# Altium PCB PCB_Control.V03.R00.PcbDoc (part 2 of 7)
Units mm, origin at the board's own origin, x right, y up, seen from the top; angles counter-clockwise.
Board outline 188 x 90 mm, 6 copper layers (Top Layer, GND 1, PWR, Signal L4, GND 2, Bottom Layer), stack 1.548 mm thick; 541 components, 265 nets, 1491 pads, 2159 vias.
Unrouted connection lines stored in the file: 819.
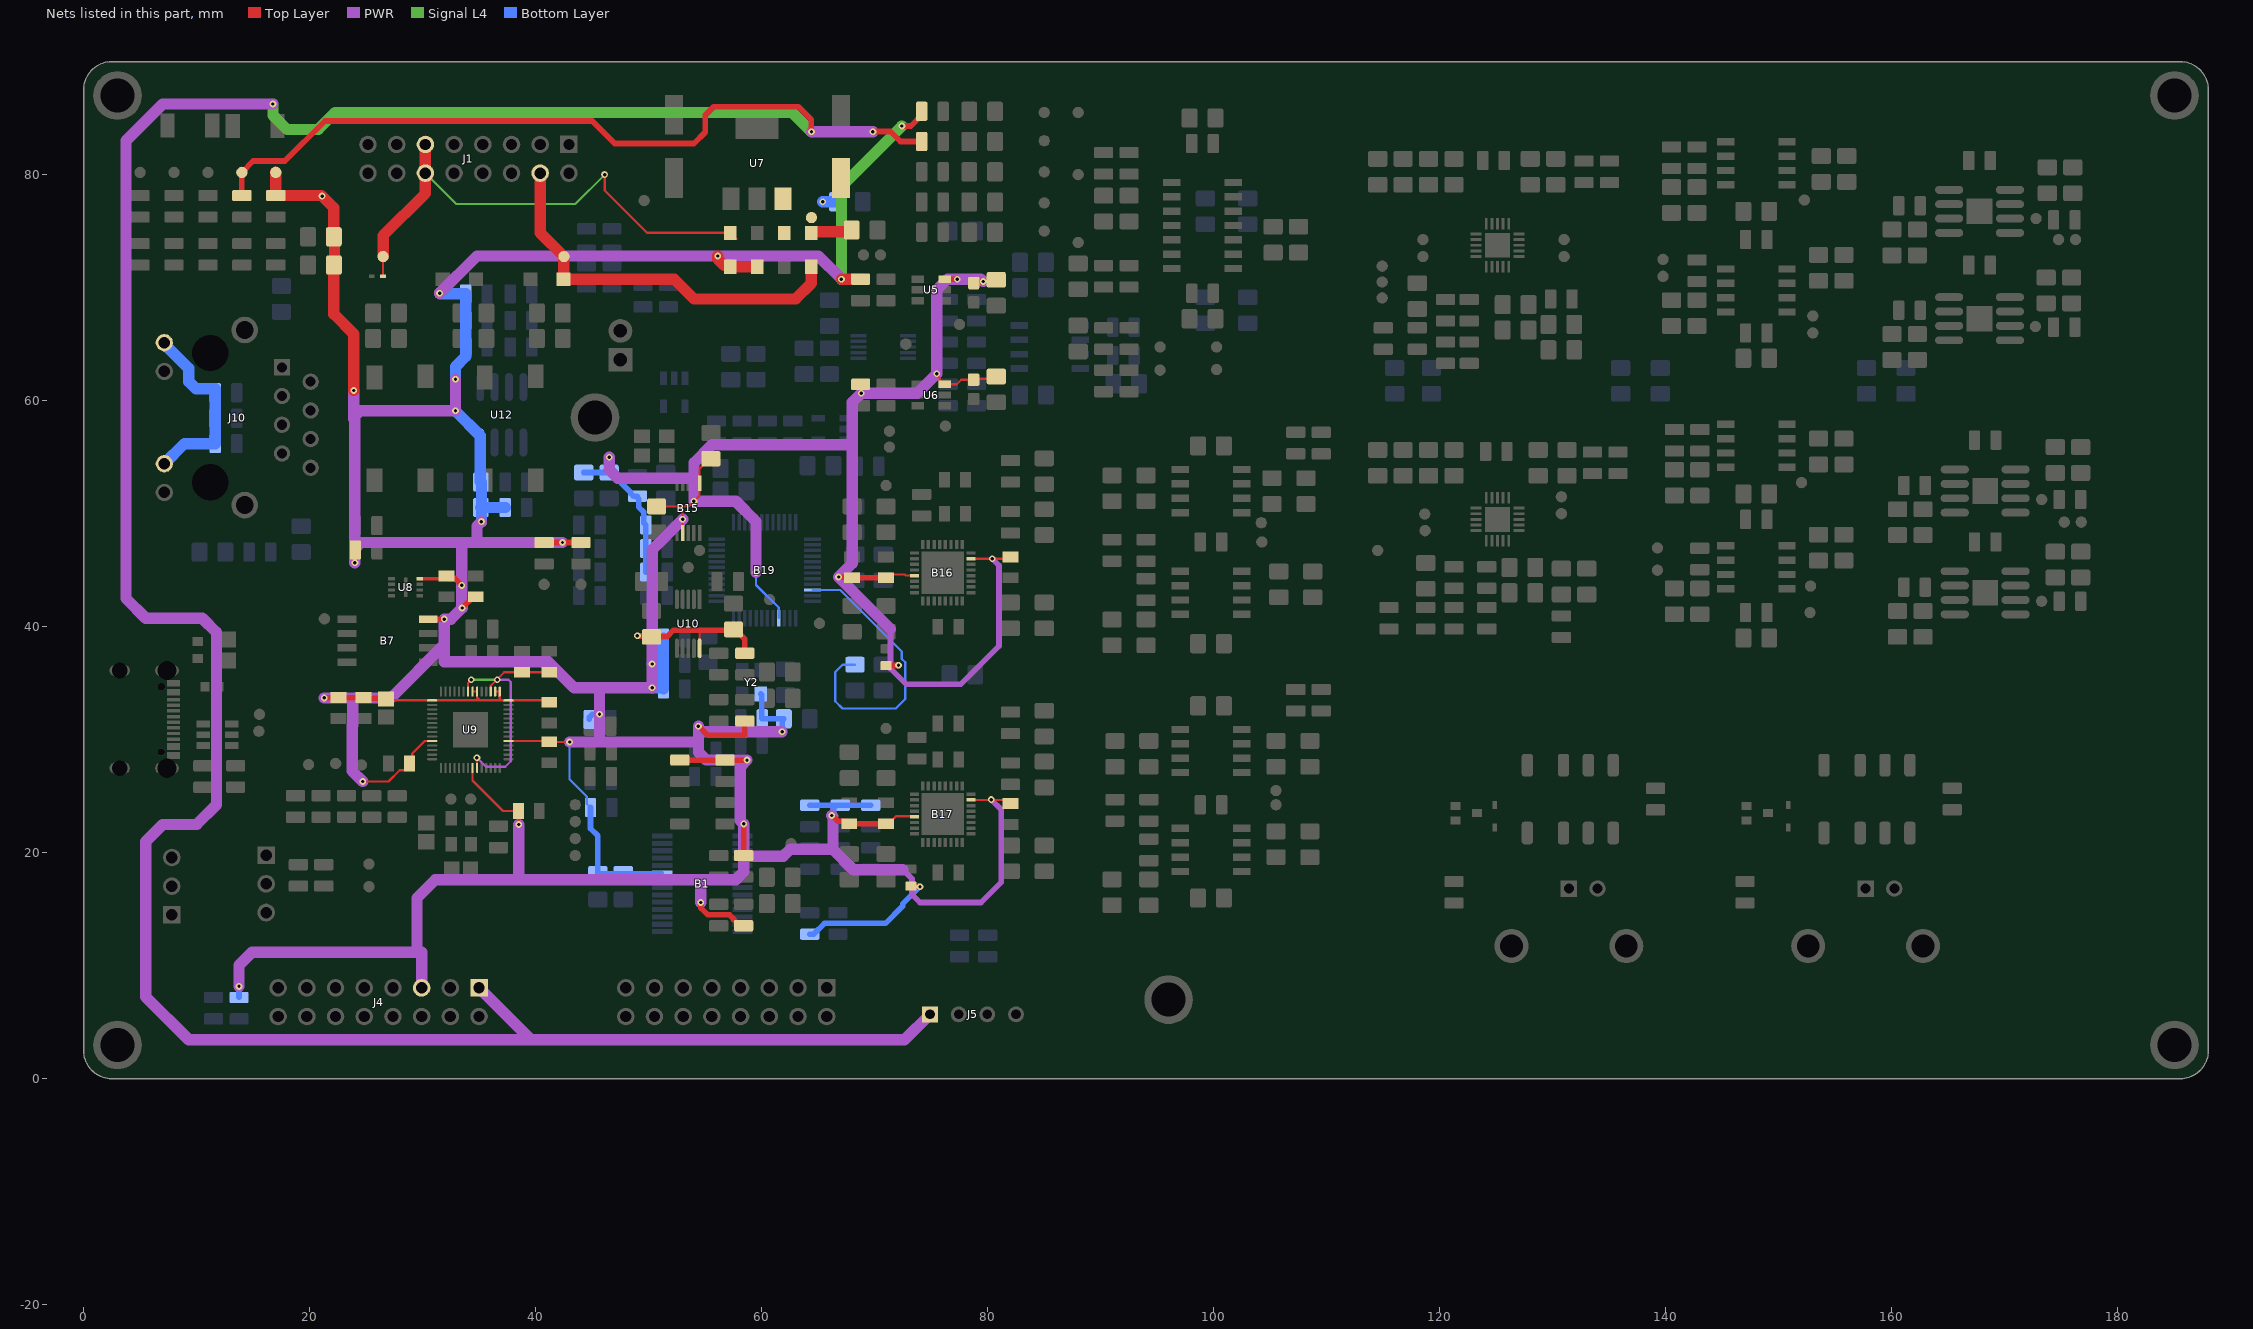
[diagram p6: the nets of this part, all layers, seen from the top]

## Components (designator, comment, footprint, x,y, rotation, side; value= is the part's Value field where it differs from the comment) (continued)
R138 "0R" RES_0805 38.7,67.1 r180 bottom (schematic designator R106)
R139 "0R" RES_0805 38.7,69.45 r180 bottom (schematic designator R107)
R140 "10K" RES_0805 52.25,39 r0 bottom (schematic designator R108)
R141 "10K" RES_0805 50.7,42.75 r0 bottom (schematic designator R109)
R142 "10K" RES_0805 44.75,42.75 r0 bottom (schematic designator R110)
R143 "10K" RES_0805 44.75,44.833 r0 bottom (schematic designator R111)
R144 "10K" RES_0805 44.75,46.917 r0 bottom (schematic designator R112)
R145 "10K" RES_0805 44.75,49 r0 bottom (schematic designator R113)
R146 "10K" RES_0805 50.7,44.833 r0 bottom (schematic designator R114)
R147 "10K" RES_0805 50.7,46.917 r180 bottom (schematic designator R115)
R148 "10K" RES_0805 50.7,49 r180 bottom (schematic designator R116)
R149 "49.9R" RES_0805 12.6,60.7 r180 bottom (schematic designator R117)
R150 "49.9R" RES_0805 12.6,56.2 r180 bottom (schematic designator R118)
R151 "49.9R" RES_0805 12.6,58.45 r180 bottom (schematic designator R119)
R152 "330R" RES_0805 46.75,74.25 r270 bottom (schematic designator R120)
R153 "330R" RES_0805 44.5,74.25 r270 bottom (schematic designator R121)
R154 "10K" RES_0805 52.25,34.5 r0 bottom (schematic designator R122)
R155 "10K" RES_0805 52.25,36.75 r0 bottom (schematic designator R123)
R156 "33R" RES_0805 56,57.25 r270 bottom (schematic designator R124)
R157 "33R" RES_0805 58.25,57.25 r270 bottom (schematic designator R125)
R158 "49.9R" RES_0805 51.75,69.25 r270 bottom (schematic designator R126)
R159 "49.9R 1%" RES_0805 49.5,69.25 r270 bottom (schematic designator R127)
R160 "33R" RES_0805 60.5,57.25 r270 bottom (schematic designator R128)
R161 "33R" RES_0805 62.75,57.25 r270 bottom (schematic designator R129)
R162 "1M" RES_0805 15.6,46.6 r0 bottom (schematic designator R130)
R163 "22 R" RES_0805 46.75,71 r270 bottom (schematic designator R131)
R164 "12K4 1%" RES_0805 69.4,54.2 r180 bottom (schematic designator R132)
R165 "22 R" RES_0805 44.5,71 r270 bottom (schematic designator R133)
R166 "0 R" RES_0805 59.1,29.6 r180 bottom (schematic designator R134)
R167 "0 R" RES_0805 59.1,31.85 r180 bottom (schematic designator R135)
R168 "22R" RES_0805 18.75,24.1 r90 top (schematic designator R136)
R169 "22R" RES_0805 21,24.1 r90 top (schematic designator R137)
R170 "22R" RES_0805 23.25,24.1 r90 top (schematic designator R138)
R171 "22R" RES_0805 25.5,24.1 r90 top (schematic designator R139)
R172 "22R" RES_0805 27.75,24.1 r90 top (schematic designator R140)
R173 "22R" RES_0805 19,18 r90 top (schematic designator R141)
R174 "22R" RES_0805 21.25,18 r90 top (schematic designator R142)
R175 "22R" RES_0805 45.75,26.75 r180 top (schematic designator R143)
R176 "22R" RES_0805 45.75,29 r180 top (schematic designator R144)
R177 "10K" RES_0603 71,37.3 r270 top (schematic designator R145)
R178 "10K" RES_0603 73.2,17.8 r270 top (schematic designator R145)
RLY1 "IM03GR" TECO-IM-8G-WING 127.739,21.75 r270 top
RLY2 "IM03GR" TECO-IM-8G-WING 153.989,21.75 r270 top
SW1 "BOOT" FP-2-1977223-2-MFG 28,57.5 r180 top
SW2 "RESET" FP-2-1977223-2-MFG 37.75,57.5 r180 top
TP1 "TP_NOBOM" PAD_RND_1MM 85,83 r90 top (schematic designator TP51)
TP2 "TP_NOBOM" PAD_RND_1MM 85,85.5 r90 top (schematic designator TP52)
TP3 "TP_NOBOM" PAD_RND_1MM 42.5,72.75 r90 top (schematic designator TP53)
TP4 "TP_NOBOM" PAD_RND_1MM 26.5,72.75 r90 top (schematic designator TP54)
TP5 "TP_NOBOM" PAD_RND_1MM 85,80.25 r90 top (schematic designator TP55)
TP6 "TP_NOBOM" PAD_RND_1MM 85,75 r90 top (schematic designator TP56)
TP7 "TP_NOBOM" PAD_RND_1MM 17,80.2 r0 top (schematic designator TP57)
TP8 "TP_NOBOM" PAD_RND_1MM 14,80.2 r0 top (schematic designator TP58)
TP9 "TP_NOBOM" PAD_RND_1MM 11,80.2 r0 top (schematic designator TP59)
TP10 "TP_NOBOM" PAD_RND_1MM 8,80.2 r0 top (schematic designator TP60)
TP11 "TP_NOBOM" PAD_RND_1MM 5,80.2 r0 top (schematic designator TP61)
TP12 "TP_NOBOM" PAD_RND_1MM 85,77.5 r90 top (schematic designator TP62)
TP13 "TP_NOBOM" PAD_RND_1MM 88,85.5 r90 top (schematic designator TP63)
TP14 "TP_NOBOM" PAD_RND_1MM 172.75,76.115 r90 top (schematic designator TP47)
TP15 "TP_NOBOM" PAD_RND_1MM 176.25,74.25 r90 top (schematic designator TP48)
TP16 "TP_NOBOM" PAD_RND_1MM 174.75,74.25 r90 top (schematic designator TP49)
TP17 "TP_NOBOM" PAD_RND_1MM 172.693,66.557 r90 top (schematic designator TP50)
TP18 "TP_NOBOM" PAD_RND_1MM 173.25,51.25 r90 top (schematic designator TP47)
TP19 "TP_NOBOM" PAD_RND_1MM 176.75,49.25 r90 top (schematic designator TP48)
TP20 "TP_NOBOM" PAD_RND_1MM 175.25,49.25 r90 top (schematic designator TP49)
TP21 "TP_NOBOM" PAD_RND_1MM 173.25,42.25 r90 top (schematic designator TP50)
TP22 "TP_NOBOM" PAD_RND_1MM 71,52.5 r90 top (schematic designator TP32)
TP23 "TP_NOBOM" PAD_RND_1MM 71,31 r90 top (schematic designator TP32)
TP24 "TP_NOBOM" PAD_RND_1MM 54.5,46.75 r90 top (schematic designator TP1)
TP25 "TP_NOBOM" PAD_RND_1MM 53.5,45.25 r90 top (schematic designator TP2)
TP26 "TP_NOBOM" PAD_RND_1MM 100.25,64.75 r90 top (schematic designator TP3)
TP27 "TP_NOBOM" PAD_RND_1MM 100.25,62.75 r90 top (schematic designator TP4)
TP28 "TP_NOBOM" PAD_RND_1MM 114.9,69.1 r90 top (schematic designator TP5)
TP29 "TP_NOBOM" PAD_RND_1MM 114.9,71.9 r90 top (schematic designator TP6)
TP30 "TP_NOBOM" PAD_RND_1MM 114.9,70.5 r90 top (schematic designator TP7)
TP31 "TP_NOBOM" PAD_RND_1MM 114.5,46.75 r90 top (schematic designator TP8)
TP32 "TP_NOBOM" PAD_RND_1MM 44,43.75 r90 top (schematic designator TP9)
TP33 "TP_NOBOM" PAD_RND_1MM 40.75,43.75 r90 top (schematic designator TP10)
TP34 "TP_NOBOM" PAD_RND_1MM 25.25,17 r90 top (schematic designator TP11)
TP35 "TP_NOBOM" PAD_RND_1MM 19.9,27.8 r90 top (schematic designator TP12)
TP36 "TP_NOBOM" PAD_RND_1MM 22.3,27.9 r90 top (schematic designator TP13)
TP37 "TP_NOBOM" PAD_RND_1MM 24.575,27.775 r90 top (schematic designator TP14)
TP38 "TP_NOBOM" PAD_RND_1MM 25.25,19 r90 top (schematic designator TP15)
TP39 "TP_NOBOM" PAD_RND_1MM 65.1,40.3 r90 top (schematic designator TP16)
TP40 "TP_NOBOM" PAD_RND_1MM 62.6,20.8 r90 top (schematic designator TP17)
TP41 "TP_NOBOM" PAD_RND_1MM 43.5,24.25 r90 top (schematic designator TP18)
TP42 "TP_NOBOM" PAD_RND_1MM 43.5,19.75 r90 top (schematic designator TP19)
TP43 "TP_NOBOM" PAD_RND_1MM 43.5,21.25 r90 top (schematic designator TP20)
TP44 "TP_NOBOM" PAD_RND_1MM 72.75,65 r90 top (schematic designator TP21)
TP45 "TP_NOBOM" PAD_RND_1MM 43.5,22.75 r90 top (schematic designator TP22)
TP46 "TP_NOBOM" PAD_RND_1MM 104.25,47.5 r90 top (schematic designator TP30)
TP47 "TP_NOBOM" PAD_RND_1MM 104.2,49.2 r90 top (schematic designator TP31)
TP48 "TP_NOBOM" PAD_RND_1MM 105.5,24.25 r90 top (schematic designator TP30)
TP49 "TP_NOBOM" PAD_RND_1MM 105.5,25.5 r90 top (schematic designator TP31)
TP50 "TP_NOBOM" PAD_RND_1MM 77.5,66.75 r90 top (schematic designator TP37)
TP51 "TP_NOBOM" PAD_RND_1MM 76.25,57.75 r90 top (schematic designator TP37)
TP52 "TP_NOBOM" PAD_RND_1MM 64.4,76.2 r270 top (schematic designator TP23)
TP53 "TP_NOBOM" PAD_RND_1MM 49.6,77.7 r90 top (schematic designator TP24)
TP54 "TP_NOBOM" PAD_RND_1MM 15.55,32.25 r90 top (schematic designator TP25)
TP55 "TP_NOBOM" PAD_RND_1MM 15.5,30.75 r90 top (schematic designator TP26)
TP56 "TP_NOBOM" PAD_RND_1MM 21.3,40.7 r90 top (schematic designator TP27)
TP57 "TP_NOBOM" PAD_RND_1MM 32.5,24.75 r90 top (schematic designator TP28)
TP58 "TP_NOBOM" PAD_RND_1MM 34.25,24.75 r90 top (schematic designator TP29)
TP59 "TP_NOBOM" PAD_RND_1MM 139.75,71 r90 top (schematic designator TP42)
TP60 "TP_NOBOM" PAD_RND_1MM 139.75,72.5 r90 top (schematic designator TP43)
TP61 "TP_NOBOM" PAD_RND_1MM 152.25,77.75 r90 top (schematic designator TP44)
TP62 "TP_NOBOM" PAD_RND_1MM 153,67.5 r90 top (schematic designator TP45)
TP63 "TP_NOBOM" PAD_RND_1MM 153,66 r90 top (schematic designator TP46)
TP64 "TP_NOBOM" PAD_RND_1MM 139.25,45 r90 top (schematic designator TP42)
TP65 "TP_NOBOM" PAD_RND_1MM 139.25,46.975 r90 top (schematic designator TP43)
TP66 "TP_NOBOM" PAD_RND_1MM 152,52.75 r90 top (schematic designator TP44)
TP67 "TP_NOBOM" PAD_RND_1MM 152.8,43.6 r90 top (schematic designator TP45)
TP68 "TP_NOBOM" PAD_RND_1MM 152.75,41.25 r90 top (schematic designator TP46)
TP69 "TP_NOBOM" PAD_RND_1MM 88,80 r90 top (schematic designator TP38)
TP70 "TP_NOBOM" PAD_RND_1MM 88,74 r90 top (schematic designator TP39)
TP71 "TP_NOBOM" PAD_RND_1MM 95.25,62.7 r90 top (schematic designator TP40)
TP72 "TP_NOBOM" PAD_RND_1MM 95.25,64.75 r90 top (schematic designator TP41)
TP73 "TP_NOBOM" PAD_RND_1MM 131,72.75 r90 top (schematic designator TP33)
TP74 "TP_NOBOM" PAD_RND_1MM 118.5,74.25 r90 top (schematic designator TP34)
TP75 "TP_NOBOM" PAD_RND_1MM 131,74.25 r90 top (schematic designator TP35)
TP76 "TP_NOBOM" PAD_RND_1MM 118.5,72.75 r90 top (schematic designator TP36)
TP77 "TP_NOBOM" PAD_RND_1MM 130.75,51.5 r90 top (schematic designator TP33)
TP78 "TP_NOBOM" PAD_RND_1MM 118.663,49.962 r90 top (schematic designator TP34)
TP79 "TP_NOBOM" PAD_RND_1MM 130.75,50 r90 top (schematic designator TP35)
TP80 "TP_NOBOM" PAD_RND_1MM 118.7,48.5 r90 top (schematic designator TP36)
TP81 "TP_NOBOM" PAD_RND_1MM 70.5,72.9 r90 top (schematic designator TP64)
TP82 "TP_NOBOM" PAD_RND_1MM 69,72.9 r90 top (schematic designator TP65)
TP83 "TP_NOBOM" PAD_RND_1MM 71.3,57.3 r90 top (schematic designator TP66)
TP84 "TP_NOBOM" PAD_RND_1MM 71.3,55.9 r90 top (schematic designator TP67)
TP85 "TP_NOBOM" PAD_RND_1MM 60.7,42.4 r90 top (schematic designator TP68)
U1 "THS3091DDARG3" TI-DDA8-1775X1775TP_M 167.75,76.75 r0 top (schematic designator U6)
U2 "THS3091DDARG3" TI-DDA8-1775X1775TP_M 167.75,67.25 r0 top (schematic designator U7)
U3 "THS3091DDARG3" TI-DDA8-1775X1775TP_M 168.25,52 r0 top (schematic designator U6)
U4 "THS3091DDARG3" TI-DDA8-1775X1775TP_M 168.25,43 r0 top (schematic designator U7)
U5 "MCP4725A1T-E/CH" SOT-23-CH6_N 75,69.8 r180 top
U6 "MCP4725A1T-E/CH" SOT-23-CH6_N 75,60.5 r180 top (schematic designator U5)
U7 "NCP1117ST33T3G" ONSC-SOT-223-4-318H-01_A_V 59.6,81 r90 top (schematic designator U1)
U8 "W25Q16JVUXIQ" FP-UX-MFG 28.5,43.5 r0 top (schematic designator U2)
U9 "RP2040" QFN-56-EP 34.217,30.882 r0 top (schematic designator U3)
U10 "SY55857LKG" FP-K10-1-IPC_A 53.5,40.25 r270 top (schematic designator U4)
U11 "OPA2197IDR" FP-D0008A-MFG 85.5,64.75 r180 bottom (schematic designator U8)
U12 "24LC1025T-E/SN" SOIC-SN8_M 37,58.75 r270 bottom (schematic designator U9)
X1 "ABM8-272-T3" ABM8272T3 33.4,21.9 r270 top
Y1 "ABM8G-25.000MHZ-B4Y-T3" FP-ABM8G-MFG 50.5,56 r180 top
Y2 "ASE-25.000MHZ-LC-T" ASE24576MHZLCT 59.1,35.1 r90 bottom

## Footprints (in the part's own frame and the unit in brackets; to place one, negate y for a bottom-side part, rotate by r counter-clockwise, add the part's x,y. Pads: shape width x height; smd on the part's side, far side on the other; paste and mask are expansions set on the pad)
54138792 [mm]
  rect 1.446x1.446 hole 0.89: 1(0,0)
  round 3.015 hole 2.01: 2(5.08,5.08) 3(-5.08,5.08)
  round 1.446 hole 0.89: G1(-2.54,0)
  silkscreen extent -7.38,-1.85 7.38,33.66, body extent -7.52,-1.08 7.24,33.85, height 13.41
ABM8272T3 [mm]
  rect 1.3x1.05 smd: 1(-1.15,-0.875) 2(1.15,-0.875) 3(1.15,0.875) 4(-1.15,0.875)
  silkscreen extent -1.2,-1.9 0.2,1.25, body extent -1.6,-1.25 1.6,1.25, height 0.49
ASE24576MHZLCT [mm]
  rect 1.3x1.1 smd: 1(-1.05,-0.825) 2(1.05,-0.825) 3(1.05,0.825) 4(-1.05,0.825)
  silkscreen extent -1.6,-1.65 1.6,1.25, body extent -1.6,-1.25 1.6,1.25, height 1.2
CAP_0805 [mm]
  rrect25% 1.4x1.7 smd: 1(-1.143,0) 2(1.143,0)
  body extent -1.15,-0.76 1.15,0.79, height 1.01
CAP_TANT_0603 [mm]
  rrect25% 1.1x1 smd: A(-0.85,0) K(0.85,0)
  body extent -0.9,-0.53 0.9,0.53, height 0.91
CAPC2013X94X50NL20T25 [mm] "Chip Capacitor, 2-Leads, Body 2.01x1.25mm, IPC Medium Density"
  rect 1.35x1.45 smd: 1(-0.825,0) 2(0.825,0)
  body extent -1.1,-0.72 1.11,0.72, height 0.94
CAPC2013X140X50NL20T25 [mm] "Chip Capacitor, 2-Leads, Body 2.00x1.25mm, IPC Medium Density"
  rect 1.3x1.45 smd: 1(-0.8,0) 2(0.8,0)
  body extent -1.1,-0.72 1.1,0.72, height 1.4
DIOD-SOT323-3_V [mm] "SOT323, 3-Leads, Body 2.2x1.35mm, Pitch 0.65mm"
  rect 0.9x0.7 smd: 1(-0.95,0.65) 2(-0.95,-0.65) 3(0.95,0)
  silkscreen extent -1.07,-1.1 0.67,1.67, body extent -1.1,-1.1 1.1,1.1, height 1.07
FB_0805 [mm]
  rrect25% 1x1.7 smd: 1(-0.95,0) 2(0.95,0)
  body extent -1,-0.63 1,0.63, height 0.86
FP-2-1977223-2-MFG [mm]
  rect 1.4x2.1 smd paste+0 mask+0: 1(2.25,4.55) 2(2.25,-4.55) 3(-2.25,4.55) 4(-2.25,-4.65)
  silkscreen extent -3.15,-3.15 3.15,6.27, body extent -3.25,-5.8 3.25,5.7, height 0.25
FP-ABM8G-MFG [mm]
  rect 1.4x1.2 smd paste+0 mask+0: 1(-1.1,-0.85) 2(1.1,-0.85) 3(1.1,0.85) 4(-1.1,0.85)
  silkscreen extent -2.48,-1.83 1.6,1.83, body extent -1.9,-1.55 1.9,1.55, height 0.25
FP-CC0603-DA-MFG [mm]
  rect 0.8x0.9 smd paste+0 mask+0: 1(-0.75,0) 2(0.75,0)
  silkscreen extent -0.85,-0.85 0.85,0.85, body extent -1.35,-0.75 1.35,0.75, height 0.25
FP-CC0805-EB-MFG [mm]
  rect 0.95x1.4 smd paste+0 mask+0: 1(-0.925,0) 2(0.925,0)
  silkscreen extent 0,-0.72 0,0.72, body extent -1.6,-1.05 1.6,1.05, height 0.25
FP-D0008A-MFG [mm]
  rrect17% 1.55x0.6 smd paste+0 mask+0: 1(-2.7,1.905) 2(-2.7,0.635) 3(-2.7,-0.635) 4(-2.7,-1.905) 5(2.7,-1.905) 6(2.7,-0.635) 7(2.7,0.635) 8(2.7,1.905)
  silkscreen extent -4.22,-2.5 1.55,2.5, body extent -3.01,-2.45 3.01,2.45, height 1.75
FP-GRM21B-0_15-IPC_A [mm]
  rect 1.406x1.508 smd paste+0 mask+0: 1(-0.926,0) 2(0.926,0)
  silkscreen extent -1.63,-1.15 1.63,1.15, body extent -2.13,-1.25 2.13,1.25, height 0.25
FP-K10-1-IPC_A [mm]
  rect 1.738x0.336 smd paste+0 mask+0: 1(-2.166,1)
  rrect100% 1.738x0.336 smd paste+0 mask+0: 2(-2.166,0.5) 3(-2.166,0) 4(-2.166,-0.5) 5(-2.166,-1) 6(2.166,-1) 7(2.166,-0.5) 8(2.166,0) 9(2.166,0.5) 10(2.166,1)
  silkscreen extent -3.66,-1.5 0.8,1.5, body extent -3.54,-2 3.54,2, height 0.25
FP-MPZ1608-0_8-IPC_C [mm]
  rect 0.806x0.858 smd paste+0 mask+0: 1(-0.626,0) 2(0.626,0)
  silkscreen extent -1.03,-0.87 1.03,0.87, body extent -1.13,-0.58 1.13,0.58, height 0.25
FP-SBH11-PBPC-D08-ST-BK-MFG [mm]
  rect 1.55x1.55 hole 1 paste-2539.97 mask+0: 1(-8.89,-1.42)
  round 1.55 hole 1 paste-2539.97 mask+0: 2(-8.89,1.12) 3(-6.35,-1.42) 4(-6.35,1.12) 5(-3.81,-1.42) 6(-3.81,1.12) 7(-1.27,-1.42) 8(-1.27,1.12) 9(1.27,-1.42) 10(1.27,1.12) 11(3.81,-1.42) 12(3.81,1.12) 13(6.35,-1.42) 14(6.35,1.12) 15(8.89,-1.42) 16(8.89,1.12)
  silkscreen extent -14.01,-5.29 14.01,4.65, body extent -14.11,-4.75 14.11,4.75, height 0.25
FP-SMBJ-MFG [mm]
  rect 1.27x2.1 smd paste+0 mask+0: 1(-1.98,0) 2(1.98,0)
  silkscreen extent -3.33,-1.97 2.28,1.97, body extent -2.72,-2.07 2.72,2.07, height 0.25
FP-SOD323F-MFG [mm]
  rect 0.71x0.403 smd paste+0 mask+0: 1(-0.995,0) 2(0.995,0)
  silkscreen extent -2.05,-0.67 0.9,0.67, body extent -1.45,-0.77 1.45,0.77, height 0.25
FP-SSQ-103-01-T-S-MFG [mm]
  rect 1.57x1.57 hole 1.02 paste-2539.97 mask+0: 1(-2.54,0)
  round 1.57 hole 1.02 paste-2539.97 mask+0: 2(0,0) 3(2.54,0)
  silkscreen extent -4.82,-1.27 4.19,1.27, body extent -4.29,-1.37 4.29,1.37, height 0.25
FP-USB4105-GF-A-MFG [mm]
  rrect100% 1x2.1 hole 1.7 slot 0.6 at 0 deg paste-2539.97 mask+0: 1(-4.32,3.015) 2(4.32,3.015)
  rrect100% 1x1.8 hole 1.4 slot 0.6 at 0 deg paste-2539.97 mask+0: 3(-4.32,-1.165) 4(4.32,-1.165)
  rect 0.6x1.15 smd paste+0 mask+0: A1-B12(-3.2,3.59) A4-B9(-2.4,3.59) B1-A12(3.2,3.59) B4-A9(2.4,3.59)
  rect 0.3x1.15 smd paste+0 mask+0: A5(-1.25,3.59) A6(-0.25,3.59) A7(0.25,3.59) A8(1.25,3.59) B5(1.75,3.59) B6(0.75,3.59) B7(-0.75,3.59) B8(-1.75,3.59)
  round 0.65 hole 0.65 unplated paste-2539.97 mask+0: ""(-2.89,2.515) ""(2.89,2.515)
  silkscreen extent -4.86,-3.84 4.86,4.84, body extent -4.96,-3.94 4.96,4.27, height 0.25
FP-UX-MFG [mm]
  rect 0.6x0.3 smd paste-1000 mask-1000: 1(-1.25,0.75) 2(-1.25,0.25) 3(-1.25,-0.25) 4(-1.25,-0.75) 5(1.25,-0.75) 6(1.25,-0.25) 7(1.25,0.25) 8(1.25,0.75)
  rect 0.3x1.7 smd paste-1000 mask+0: 9(0,0)
  silkscreen extent -2.32,-1.3 1.55,1.3, body extent -1.75,-1.15 1.75,1.15, height 0.25
JMP2_TH [mm]
  rect 2.1x2.1 hole 1.2: 1(-1.27,0)
  round 2.1 hole 1.2: 2(1.27,0)
  silkscreen extent -3.25,-1.5 2.75,2
LED_0805_BLUE [mm]
  rrect25% 1x1.7 smd: A(0.95,0) K(-0.95,0)
  silkscreen extent -1.8,-1.2 -0.9,1.2, body extent -1,-0.63 1,0.63, height 1.12
LED_0805_GREEN [mm]
  rrect25% 1x1.7 smd: A(0.95,0) K(-0.95,0)
  silkscreen extent -1.8,-1.2 -0.9,1.2, body extent -1,-0.63 1,0.63, height 1.12
ONSC-SOD-123FL-2-498_V [mm] "SOD, 2-Leads, Body 2.7x1.65mm"
  rect 1.25x1.22 smd: 1(-1.475,0) 2(1.475,0)
  silkscreen extent -1.6,-0.82 0.45,1.28, body extent -1.35,-0.82 1.35,0.82, height 0.98
ONSC-SOT-223-4-318H-01_A_V [mm] "SOT223, 4-Leads, Body 6.5x3.5mm, Pitch 2.3mm"
  rect 2x1.5 smd: 1(-3.15,2.3) 2(-3.15,0) 3(-3.15,-2.3)
  rect 2x3.8 smd: 4(3.15,0)
  silkscreen extent -3.55,-3.25 1.75,3.72, body extent -1.75,-3.25 1.75,3.25, height 1.8
PAD_RND_1MM [mm]
  round 1 smd paste-0.5 mask+0: 1(0,0)
QFN50P400X400X90-21N-D [mm]
  rect 1x0.25 smd: 1(-1.9,1) 2(-1.9,0.5) 3(-1.9,0) 4(-1.9,-0.5) 5(-1.9,-1) 11(1.9,-1) 12(1.9,-0.5) 13(1.9,0) 14(1.9,0.5) 15(1.9,1)
  rect 0.25x1 smd: 6(-1,-1.9) 7(-0.5,-1.9) 8(0,-1.9) 9(0.5,-1.9) 10(1,-1.9) 16(1,1.9) 17(0.5,1.9) 18(0,1.9) 19(-0.5,1.9) 20(-1,1.9)
  rect 2.2x2.2 smd: 21(0,0)
  silkscreen extent -2.52,1.63 -2.27,1.87, body extent -2.05,-2.05 2.05,2.05, height 0.9
QFN50P500X500X80-33N-D [mm]
  rect 0.8x0.3 smd: 1(-2.5,1.75) 2(-2.5,1.25) 3(-2.5,0.75) 4(-2.5,0.25) 5(-2.5,-0.25) 6(-2.5,-0.75) 7(-2.5,-1.25) 8(-2.5,-1.75) 17(2.5,-1.75) 18(2.5,-1.25) 19(2.5,-0.75) 20(2.5,-0.25) 21(2.5,0.25) 22(2.5,0.75) 23(2.5,1.25) 24(2.5,1.75)
  rect 0.3x0.8 smd: 9(-1.75,-2.5) 10(-1.25,-2.5) 11(-0.75,-2.5) 12(-0.25,-2.5) 13(0.25,-2.5) 14(0.75,-2.5) 15(1.25,-2.5) 16(1.75,-2.5) 25(1.75,2.5) 26(1.25,2.5) 27(0.75,2.5) 28(0.25,2.5) 29(-0.25,2.5) 30(-0.75,2.5) 31(-1.25,2.5) 32(-1.75,2.5)
  rect 3.75x3.75 smd: 33(0,0)
  silkscreen extent -3.02,2.38 -2.77,2.62, body extent -2.55,-2.55 2.55,2.55, height 0.8
QFN-56-EP [mm]
  oval 0.9x0.2 smd mask+0.15: 1(-3.375,2.6) 2(-3.375,2.2) 3(-3.375,1.8) 4(-3.375,1.4) 5(-3.375,1) 6(-3.375,0.6) 7(-3.375,0.2) 8(-3.375,-0.2) 9(-3.375,-0.6) 10(-3.375,-1) 11(-3.375,-1.4) 12(-3.375,-1.8) 13(-3.375,-2.2) 14(-3.375,-2.6) 29(3.375,-2.6) 30(3.375,-2.2) 31(3.375,-1.8) 32(3.375,-1.4) 33(3.375,-1) 34(3.375,-0.6) 35(3.375,-0.2) 36(3.375,0.2) 37(3.375,0.6) 38(3.375,1) 39(3.375,1.4) 40(3.375,1.8) 41(3.375,2.2) 42(3.375,2.6)
  oval 0.2x0.9 smd mask+0.15: 15(-2.6,-3.375) 16(-2.2,-3.375) 17(-1.8,-3.375) 18(-1.4,-3.375) 19(-1,-3.375) 20(-0.6,-3.375) 21(-0.2,-3.375) 22(0.2,-3.375) 23(0.6,-3.375) 24(1,-3.375) 25(1.4,-3.375) 26(1.8,-3.375) 27(2.2,-3.375) 28(2.6,-3.375) 43(2.6,3.375) 44(2.2,3.375) 45(1.8,3.375) 46(1.4,3.375) 47(1,3.375) 48(0.6,3.375) 49(0.2,3.375) 50(-0.2,3.375) 51(-0.6,3.375) 52(-1,3.375) 53(-1.4,3.375) 54(-1.8,3.375) 55(-2.2,3.375) 56(-2.6,3.375)
  rect 3.1x3.1 smd: 57(0,0)
  silkscreen extent -4.42,-3.65 3.65,3.65, body extent -3.51,-3.51 3.51,3.51, height 1.01
QFP50P900X900X160-48N [mm]
  rect 1.475x0.3 smd: 1(-4.238,2.75) 2(-4.238,2.25) 3(-4.238,1.75) 4(-4.238,1.25) 5(-4.238,0.75) 6(-4.238,0.25) 7(-4.238,-0.25) 8(-4.238,-0.75) 9(-4.238,-1.25) 10(-4.238,-1.75) 11(-4.238,-2.25) 12(-4.238,-2.75) 25(4.238,-2.75) 26(4.238,-2.25) 27(4.238,-1.75) 28(4.238,-1.25) 29(4.238,-0.75) 30(4.238,-0.25) 31(4.238,0.25) 32(4.238,0.75) 33(4.238,1.25) 34(4.238,1.75) 35(4.238,2.25) 36(4.238,2.75)
  rect 0.3x1.475 smd: 13(-2.75,-4.238) 14(-2.25,-4.238) 15(-1.75,-4.238) 16(-1.25,-4.238) 17(-0.75,-4.238) 18(-0.25,-4.238) 19(0.25,-4.238) 20(0.75,-4.238) 21(1.25,-4.238) 22(1.75,-4.238) 23(2.25,-4.238) 24(2.75,-4.238) 37(2.75,4.238) 38(2.25,4.238) 39(1.75,4.238) 40(1.25,4.238) 41(0.75,4.238) 42(0.25,4.238) 43(-0.25,4.238) 44(-0.75,4.238) 45(-1.25,4.238) 46(-1.75,4.238) 47(-2.25,4.238) 48(-2.75,4.238)
  silkscreen extent -4.85,-3.15 3.15,3.62, body extent -4.5,-4.5 4.5,4.5, height 1.6
RES_0603 [mm]
  rrect25% 0.8x1 smd: 1(-0.75,0) 2(0.75,0)
  body extent -0.8,-0.43 0.8,0.43, height 0.52
RES_0805 [mm]
  rrect25% 1x1.7 smd: 1(-0.95,0) 2(0.95,0)
  body extent -1,-0.63 1,0.63, height 0.47
SI60118F [mm]
  rect 1.446x1.446 hole 0.89: 1(0,0)
  round 1.446 hole 0.89: 2(1.27,2.54) 3(2.54,0) 4(3.81,2.54) 5(5.08,0) 6(6.35,2.54) 7(7.62,0) 8(8.89,2.54)
  round 1.53 hole 1.02: 9(-2.18,-10.41) 10(0.36,-10.41) 11(8.53,-10.41) 12(11.07,-10.41)
  round 2.355 hole 1.57: MH1(-3.3,-3.3) MH2(12.19,-3.3)
  round 1.607 hole 3.215 unplated: MH3(-1.27,-6.35) MH4(10.16,-6.35)
  silkscreen extent -4.59,-17.25 13.48,4.35, body extent -5.05,-17.4 13.94,4.19, height 15.57
SMTC-MTSW-103-08-X-S-229-RA [mm] "Assembly .025\" [.64] SQ Post Terminal Strip, 1x3 Pins, Right Angle, 2.54mm Pitch, Male"
  rect 1.55x1.55 hole 1.02: 1(0,0)
  round 1.55 hole 1.02: 2(2.54,0) 3(5.08,0)
  silkscreen extent -1.46,1.52 6.54,4.06, body extent -1.27,-0.32 6.35,9.88, height 3.05
SMTC-SLW-104-01-X-S [mm] "Low Profile Socket Strip, 1x4 Pins, Vertical, 2.54mm Pitch, Female"
  rect 1.4x1.4 hole 0.86: 1(0,0)
  round 1.4 hole 0.86: 2(2.54,0) 3(5.08,0) 4(7.62,0)
  silkscreen extent -1.4,-1.27 9.02,1.27, body extent -1.27,-1.27 8.89,1.27, height 4.57
SODFL1006X40N [mm]
  rect 0.51x0.32 smd: 1(-0.5,0) 2(0.5,0)
  silkscreen extent -0.75,-0.3 0.4,0.3, body extent -0.5,-0.3 0.5,0.3, height 0.4
SODFL3616X98N [mm]
  rect 1.24x1.12 smd: 1(-1.5,0) 2(1.5,0)
  silkscreen extent -2.12,-0.82 1.35,0.82, body extent -1.8,-0.82 1.8,0.82, height 0.98
SOIC127P600X175-8N [mm]
  rect 1.525x0.65 smd: 1(-2.712,1.905) 2(-2.712,0.635) 3(-2.712,-0.635) 4(-2.712,-1.905) 5(2.712,-1.905) 6(2.712,-0.635) 7(2.712,0.635) 8(2.712,1.905)
  silkscreen extent -3.47,-2.45 1.6,2.58, body extent -3,-2.45 3,2.45, height 1.75
SOIC127P600X175-14N [mm]
  rect 1.525x0.65 smd: 1(-2.712,3.81) 2(-2.712,2.54) 3(-2.712,1.27) 4(-2.712,0) 5(-2.712,-1.27) 6(-2.712,-2.54) 7(-2.712,-3.81) 8(2.712,-3.81) 9(2.712,-2.54) 10(2.712,-1.27) 11(2.712,0) 12(2.712,1.27) 13(2.712,2.54) 14(2.712,3.81)
  silkscreen extent -3.47,-4.33 1.6,4.48, body extent -3.11,-4.33 2.92,4.32, height 1.75
SOIC127P790X216-8N [mm]
  rect 1.65x0.65 smd: 1(-3.6,1.905) 2(-3.6,0.635) 3(-3.6,-0.635) 4(-3.6,-1.905) 5(3.6,-1.905) 6(3.6,-0.635) 7(3.6,0.635) 8(3.6,1.905)
  silkscreen extent -4.43,-2.64 2.42,2.64, body extent -3.96,-2.64 3.94,2.64, height 2.16
SOIC-SN8_M [mm] "SOIC, 8-Leads, Body 4.9x3.9mm, Pitch 1.27mm, IPC Low Density"
  oval 2.5x0.7 smd: 1(-2.45,1.905) 2(-2.45,0.635) 3(-2.45,-0.635) 4(-2.45,-1.905) 5(2.45,-1.905) 6(2.45,-0.635) 7(2.45,0.635) 8(2.45,1.905)
  silkscreen extent -2.57,-2.5 0.8,2.93, body extent -2,-2.5 2,2.5, height 1.75
SOP50P490X110-10N [mm]
  rect 1.4x0.3 smd: 1(-2.2,1) 2(-2.2,0.5) 3(-2.2,0) 4(-2.2,-0.5) 5(-2.2,-1) 6(2.2,-1) 7(2.2,-0.5) 8(2.2,0) 9(2.2,0.5) 10(2.2,1)
  silkscreen extent -2.9,-1.5 1.15,1.5, body extent -2.45,-1.5 2.45,1.5, height 1.1
SOP65P780X200-28N [mm]
  rect 1.8x0.45 smd: 1(-3.55,4.225) 2(-3.55,3.575) 3(-3.55,2.925) 4(-3.55,2.275) 5(-3.55,1.625) 6(-3.55,0.975) 7(-3.55,0.325) 8(-3.55,-0.325) 9(-3.55,-0.975) 10(-3.55,-1.625) 11(-3.55,-2.275) 12(-3.55,-2.925) 13(-3.55,-3.575) 14(-3.55,-4.225) 15(3.55,-4.225) 16(3.55,-3.575) 17(3.55,-2.925) 18(3.55,-2.275) 19(3.55,-1.625) 20(3.55,-0.975) 21(3.55,-0.325) 22(3.55,0.325) 23(3.55,0.975) 24(3.55,1.625) 25(3.55,2.275) 26(3.55,2.925) 27(3.55,3.575) 28(3.55,4.225)
  silkscreen extent -4.45,-5.1 2.3,5.1, body extent -3.86,-5.12 3.94,5.08, height 2
SOT95P280X145-5N [mm]
  rect 1.2x0.6 smd: 1(-1.25,0.95) 2(-1.25,0) 3(-1.25,-0.95) 4(1.25,-0.95) 5(1.25,0.95)
  silkscreen extent -1.85,-1.45 0.3,1.5, body extent -1.53,-1.45 1.27,1.45, height 1.2
SOT95P280X145-6N [mm]
  rect 1.2x0.6 smd: 1(-1.25,0.95) 2(-1.25,0) 3(-1.25,-0.95) 4(1.25,-0.95) 5(1.25,0) 6(1.25,0.95)
  silkscreen extent -1.85,-1.46 0.3,1.6, body extent -1.4,-1.46 1.4,1.46, height 1.45
SOT-23-CH6_N [mm] "SOT23, 6-Leads, Body 2.9x1.7mm, Pitch 0.95mm, Lead Span 2.8mm, IPC Medium Density"
  rect 1.1x0.65 smd: 1(-1.2,0.95) 2(-1.2,0) 3(-1.2,-0.95) 4(1.2,-0.95) 5(1.2,0) 6(1.2,0.95)
  silkscreen extent -1.33,-1.55 0.25,1.95, body extent -0.9,-1.55 0.9,1.55, height 1.45
TECO-IM-8G-WING [mm] "Relay, 8-Leads, Body 10x6mm, Height 5.65mm, Pitch 2.2mm"
  rrect50% 2x1 smd paste+0 mask+0: 1(0,0) 2(0,3.2) 3(0,5.4) 4(0,7.6) 5(-6,7.6) 6(-6,5.4) 7(-6,3.2) 8(-6,0)
  silkscreen extent -6.1,-1.5 0.1,8.8, body extent -6.79,-1.02 0.7,8.64, height 3.8
TI-DDA8-1775X1775TP_M [mm] "SOP, 8-Leads, Body 4.9x3.9mm, Pitch 1.27mm, Thermal Pad 1.775x1.775mm, IPC Low Density"
  oval 2.5x0.7 smd: 1(-2.69,1.905) 2(-2.69,0.635) 3(-2.69,-0.635) 4(-2.69,-1.905) 5(2.69,-1.905) 6(2.69,-0.635) 7(2.69,0.635) 8(2.69,1.905)
  rect 2.28x2.28 smd: 9(0,0)
  silkscreen extent -2.6,-2.5 0.83,2.93, body extent -2,-2.5 2,2.5, height 1.7
WCAP-ASLI_D6.3H7.7 [mm] "Aluminium Electrolytic V-Chip SMT Capacitors, 6.3x7.7mm"
  rect 3.5x1.6 smd: 1(2.8,0) 2(-2.8,0)
  silkscreen extent -3.4,-3.4 3.4,3.4, body extent -3.65,-3.3 3.65,3.3, height 7.7

## Part data
B1: "I/O Port Expander 16-Bit SPI SSOP28", Manufacturer_Name=Microchip, Manufacturer_Part_Number=MCP23S17-E/SS, Mouser Part Number=579-MCP23S17-E/SS, Datasheet Link=https://datasheet.datasheetarchive.com/originals/distributors/SFDatasheet-4/sf-00090057.pdf, Geometry.Height=2mm, Mouser Price/Stock=https://www.mouser.co.uk/ProductDetail/Microchip-Technology/MCP23S17-E-SS?qs=usxtMOJb1RweSOLq2FO9lA%3D%3D
B2 B4: "Single Supply, Dual 345 MHz Rail-to-Rail Output Amplifier", Manufacturer_Name="Texas Instruments", Manufacturer_Part_Number=LMH6612MAX/NOPB, Mouser Part Number=926-LMH6612MAX/NOPB, Datasheet Link=http://www.ti.com/lit/gpn/LMH6612, Geometry.Height=1.75mm, Mouser Price/Stock=https://www.mouser.co.uk/ProductDetail/Texas-Instruments/LMH6612MAX-NOPB?qs=7lkVKPoqpbYkkjxJnAARvQ%3D%3D
B3 B5 B8 B9 B10 B11: "Super-Fast Ultra-Low Distortion High Speed Amplifier", Manufacturer_Name="Texas Instruments", Mouser Part Number=595-THS4271D, Datasheet Link=http://www.ti.com/lit/ds/symlink/ths4271.pdf, Geometry.Height=1.75mm, Manufacturer_Part_Number=THS4271D, Mouser Price/Stock=https://www.mouser.co.uk/ProductDetail/Texas-Instruments/THS4271D?qs=ZmJdcv7QZ9ppdaigv2fizw%3D%3D
B6: "TVS Diode Array Uni-Directional USBLC6-2SC6 17V, SOT-23 6-Pin", Manufacturer_Name=STMicroelectronics, Mouser Part Number=511-USBLC6-2SC6, Datasheet Link=https://www.st.com/resource/en/datasheet/usblc6-2.pdf, Geometry.Height=1.45mm, Manufacturer_Part_Number=USBLC6-2SC6, Mouser Price/Stock=https://www.mouser.co.uk/ProductDetail/STMicroelectronics/USBLC6-2SC6?qs=po45yt2pPpu%2FhNIlwQdTlg%3D%3D
B7: "3V 128M-BIT SERIAL FLASH MEMORY WITH DUAL/QUAD SPI & QPI & DTR", Manufacturer_Name=Winbond, Manufacturer_Part_Number="W25Q128JVSIM TR", Mouser Part Number=454-W25Q128JVSIMTR, Datasheet Link=http://www.winbond.com/resource-files/w25q128jv%20dtr%20revb%2011042016.pdf, Geometry.Height=2.16mm, Mouser Price/Stock=https://www.mouser.co.uk/ProductDetail/Winbond/W25Q128JVSIM-TR?qs=qSfuJ%252Bfl%2Fd6ji9IuruL6Zg%3D%3D
B12: "36-V, Precision, Rail-to-Rail Input Output, Low Offset Voltage Op Amp", Manufacturer_Name="Texas Instruments", Mouser Part Number=595-OPA4197ID, Datasheet Link=http://www.ti.com/lit/gpn/OPA4197, Geometry.Height=1.75mm, Manufacturer_Part_Number=OPA4197ID, Mouser Price/Stock=https://www.mouser.co.uk/ProductDetail/Texas-Instruments/OPA4197ID?qs=LuYMPh7GGMRrQsevs5FGag%3D%3D
B13 B14: "RF ATTENUATOR 31.5DB 50OHM 20QFN", Manufacturer_Name="Peregrine Semiconductor", Mouser Part Number=81-PE4312C-Z, Datasheet Link=https://www.psemi.com/pdf/datasheets/pe4312ds.pdf, Geometry.Height=0.9mm, Manufacturer_Part_Number=PE4312C-Z, Mouser Price/Stock=https://www.mouser.co.uk/ProductDetail/pSemi/PE4312C-Z?qs=l7cgNqFNU1hgFbGgRtu7ww%3D%3D
B15: "Clock Generator 10MHz to 100MHz-IN 160MHz-OUT 10-Pin MSOP T/R", Manufacturer_Name=Skyworks, Mouser Part Number=634-SI5351A-B-GTR, Datasheet Link=https://www.mouser.de/datasheet/2/472/Si5351_B-2507774.pdf, Geometry.Height=1.1mm, Manufacturer_Part_Number=SI5351A-B-GTR, Mouser Price/Stock=https://www.mouser.co.uk/ProductDetail/Skyworks-Solutions-Inc/SI5351A-B-GTR?qs=p9T7GgSe1IEYql%252BRMAlVcw%3D%3D
B16 B17: "Analog Devices AD9102BCPZ, 14 bit Serial DAC, 180Msps, 32-Pin LFCSP", Manufacturer_Name="Analog Devices", Mouser Part Number=584-AD9102BCPZ, Datasheet Link=https://www.analog.com/media/en/technical-documentation/data-sheets/AD9102.pdf, Geometry.Height=0.8mm, Manufacturer_Part_Number=AD9102BCPZ, Mouser Price/Stock=https://www.mouser.co.uk/ProductDetail/Analog-Devices/AD9102BCPZ?qs=%2FtpEQrCGXCx4RM%2FcE0d16g%3D%3D
B18: "16-bit, dual-channel, low-power, ultra-low glitch, voltage output DAC with 2.5V, 4ppm/C reference", Manufacturer_Name="Texas Instruments", Mouser Part Number=595-DAC8562SDGSR, Datasheet Link=http://www.ti.com/lit/gpn/dac8562, Geometry.Height=1.1mm, Manufacturer_Part_Number=DAC8562SDGSR, Mouser Price/Stock=https://www.mouser.co.uk/ProductDetail/Texas-Instruments/DAC8562SDGSR?qs=L4ss%2FyqpMWQjhHzbOFnTNg%3D%3D
B19: "Ethernet ICs 3in1 Enet Controller TCP/IP +MAC+PHY", Manufacturer_Name="WIZnet Inc", Mouser Part Number=950-W5500, Datasheet Link=http://wizwiki.net/wiki/lib/exe/fetch.php?media=products:w5500:w5500_ds_v106e_141230.pdf, Geometry.Height=1.6mm, Manufacturer_Part_Number=W5500, Mouser Price/Stock=https://www.mouser.co.uk/ProductDetail/WIZnet/W5500?qs=2vh%252B45pPFtzthUpYPd4pqA%3D%3D
C1 C2 C3 C4 C5 C6 C7 C8 C9 C10 C11 C12 C13 C14 C15 C16 C17 C18 C19 C20 C21 C22 C23 C24 C25 C26 C27 C28 C29 C30 C31 C32 C33 C34 C35 C36 C37 C38 C39 C40 C41 C42 C43 C44 C45 C46 C47 C48 C49 C50 C51 C52 C53 C54 C55 C56 C57 C58 C59 C60 C61 C62 C63 C64 C65 C66 C68 C87 C88 C89 C90 C91 C92 C93 C94 C95 C96 C97 C98 C99 C100 C101 C102 C103 C104 C105 C106 C107 C108 C109 C110 C111 C112 C113 C114 C115 C116 C117 C118 C119 C120 C121 C122 C123 C124 C125 C126 C127 C128 C129 C130 C131 C132 C133 C134 C135 C136 C137 C138 C145 C146 C147 C148 C149 C150 C151 C152 C159 C160 C161 C162 C163 C164 C165 C166 C167 C168 C169 C170 C171 C172 C173 C174 C175 C176 C177 C178 C179 C180 C181 C182 C183 C184 C185 C186 C187 C188 C189 C190 C191 C192 C193 C194 C195 C196 C197 C198 C199 C200: library part CAP_0805, "Capacitor SMD 0805"
C67 C69: library part CAP_TANT_0603, "Capacitor SMD Tantalum 0603"
C70 C71: library part CMP-03913-89507488-2, "WCAP-ASLI Radial Can - SMD aluminum electrolytic capacitor 0.248Dia 6.30mm ±20% 10muF 80V", Capacitance=10µF, Insulation Resistance=10MΩ, Leakage Current=8µA, Max Operating Temperature=105°C, Min Operating Temperature=-55°C, Ripple Current=35mA, Voltage Rating=80V, Diameter=6.3mm, Height=7.7mm, Impedance=2.661Ω, Length=7.7mm, Packaging="Cut Tape", RoHS=Compliant, Voltage Rating (DC)=80V, Width=6.6mm
C72: library part CMP-03422-000187-1, "CC0603 2.2 uF X5R 10.00% 16 V", Capacitance="2.2 uF", Manufacturer=YAGEO, Manufacturer Part Number=CC0603KPX5R7BB225, Package=CC0603-DA, Temperature="-55°C to +125°C", Temperature Characteristic=X5R, Temperature Coefficient=15%, Temperature Range High=+125°C, Temperature Range Low=-55°C, Tolerance=0.1, Voltage="16 V", Automotive=No, Category=Cap, ComponentLink2Description=Datasheet, ComponentLink2URL=http://www.yageo.com/documents/recent/UPY-GPHC_X7R_6.3V-to-50V_18.pdf, Device Class L1="Passive Components", Device Class L2=Capacitors, Device Class L3="Ceramic Capacitors", Footprint Url=http://www.yageo.com/exep/pages/download/literatures/UPY-C_GEN_24.pdf, Height=0.9mm, Lead Free=Yes, Material=Ceramic, Octopart=https://octopart.com/cc0603kpx5r7bb225-yageo-91091799, RoHS=TRUE, Voltage Rating="16 V"
C73: library part CMP-06035-033280-1, "Chip Multilayer Ceramic Capacitors for General Purpose, 0805, 4.7uF, X6S, 22%, 20%, 35V", Case/Package=0805, Dielectric=X6S, Tolerance=20%, Voltage Rating (DC)=35V, Capacitance=4.7uF, Length=2mm, Thickness=1.25mm, Width=1.25mm
C74 C75 C76 C77 C78 C79 C80 C81 C82 C84 C139 C140 C141 C142 C143 C144 C153 C154 C155 C156 C157 C158: library part CMP-00621-107850848-1, "CC0805KKX7RYBB104 Capacitor Ceramic 0.01uF 250V X7R 10% 0805 T/R", Capacitance=100nF, Case/Package=0805, Max Operating Temperature=125°C, Min Operating Temperature=-55°C, Tolerance=10%, Voltage Rating=250V, Height=1.45mm, Material=Ceramic, NexarPartId=107850848
C83: library part CMP-2007-04663-1, Manufacturer="AVX Interconnect / Elco", Part Number=0805YD105MAT2A
C85 C86: library part CMP-1036-01049-2, Manufacturer="AVX Interconnect / Elco", Part Number=08051A150FAT2A
D1: "SZ Prefix for Automotive and Other Applications Requiring Unique Site and Control Change Requirements ; AECQ101 Qualified and PPAP Capable ; This is a PbFree Device; Low Capacitance 15 pF; Low Clamping Voltage; Small Body Outline Dimensions: 0.039 x 0.024 (1.0mm x 0.60mm); Low Body Height: 0.016 (0.4 mm); Response Time is < 1 ns; IEC6100042 Level 4 ESD Protection; Low Leakage", Manufacturer_Name=onsemi, Mouser Part Number=863-ESD9B3.3ST5G, Datasheet Link=https://www.onsemi.com/pub/Collateral/ESD9B-D.PDF, Geometry.Height=0.4mm, Manufacturer_Part_Number=ESD9B3.3ST5G, Mouser Price/Stock=https://www.mouser.co.uk/ProductDetail/onsemi/ESD9B3.3ST5G?qs=yU2N9dt%252BrfmXrPf3vhgUEA%3D%3D
D2 D3: library part CMP-1061-00612-1, "200 W Transient Voltage Suppressor, 2-Pin SOD-123FL, Pb-Free, Tape and Reel", Manufacturer="On Semiconductor", ComponentLink1Description="Manufacturer URL", ComponentLink1URL=http://www.onsemi.com/, ComponentLink2Description=Datasheet, ComponentLink2URL=http://www.onsemi.com/pub_link/Collateral/SMF5.0AT1-D.PDF, ComponentLink3Description="Package Specification", ComponentLink3URL=http://www.onsemi.com/pub_link/Collateral/498-01.PDF, DatasheetVersion="Rev. 7", Direction=Unidirectional, IR Max (uA)=400, Mounting Technology="Surface Mount", PackageDescription="2-Pin SOD, Body 1.65 x 2.7 mm", PackageReference=SOD-123FL-2-498, PackageVersion="Rev. D, 05/2013", Packing="Tape and Reel", PartNumber=SMF5.0AT1G, RoHS=Pb-Free, V(BR) Typ (V)=6.7
D4 D10: library part CMP-07401-000033-1, "TVS DIODE 15VWM 24.4VC SMB", Breakdown Voltage=19.2V, Case/Package=DO-214AA, Clamping Voltage=24.4V, Leakage Current=5uA, Max Operating Temperature=150°C, Max Power Dissipation=600W, Max Surge Current=100A, Min Breakdown Voltage=16.7V, Min Operating Temperature=-55°C, Operating Supply Voltage=3.5V, Package Quantity=1, Peak Pulse Current=24A, Power Line Protection=No, Resistor Type=Zener, Reverse Standoff Voltage=15V, Test Current=1mA, Diode Type=ZENER, Direction=Unidirectional, Element Configuration=Single, ESD Protection=Yes, Height=2.42mm, Length=4.57mm, Max Breakdown Voltage=19.2V, Max Reverse Leakage Current=5uA, Mount="Surface Mount", Number of Channels=1, Number of Elements=1, Number of Pins=2, Number of Unidirectional Channels=1, Packaging="Tape and Reel", Peak Pulse Power=600W, Polarity=Unidirectional, Radiation Hardening=No, REACH SVHC="No SVHC", Reverse Breakdown Voltage=16.7V, RoHS Compliant=Yes, Series=SMBJ, Termination=SMD/SMT, Width=3.94mm
D5 D6 D7 D8 D9 D14: library part LED_0805_GREEN, "LED 0805 GREEN SMD"
D11 D12: library part CMP-12791-000029-1, "DIODE GEN PURP 100V 250MA SOD323", Capacitance=1.5pF, Forward Current=250mA, Manufacturer="Diodes Inc.", Max Junction Temp=+150°C, Max Repetitive Reverse Voltage=100V, Max Surge Forward Current=0.5A, Package=SOD323F, Peak Reverse Current=0.5uA, Temperature="-55°C to +150°C", Temperature Range Low=-55°C, Automotive=No, Category=Diode, ComponentLink2Description=Datasheet, ComponentLink2URL=https://www.diodes.com/assets/Datasheets/1N4148WSF.pdf, Device Class L1="Discrete Semiconductors", Device Class L2=Diodes, Device Class L3="Rectifier Diodes", Digikey Description="DIODE GEN PURP 100V 250MA SOD323", Footprint Url=https://www.diodes.com/assets/Package-Files/SOD323F.pdf, Height=0.75mm, Lead Free=Yes, Manufacturer Part Number=1N4148WSF-7, Mouser Description="Diodes - General Purpose, Power, Switching 200mW 2pF 75Vrrm 150mA 2A 1VF", Octopart=https://octopart.com/1n4148wsf-7-diodes+inc.-33798544, Reverse Voltage=100V, RoHS=TRUE, Temperature Range High=+150°C
D13: library part LED_0805_BLUE, "LED 0805 BLUE SMD"
D15 D16 D17 D18: "Guardring for Stress Protection; Optimized for Very Low Forward Voltage; 125 C Operating Junction Temperature; Epoxy Meets UL94, VO; Package Designed for Optimal Automated Board Assembly; ESD Rated Machine Model C; ESD Rated Human Body Model 3B; Device Meets MSL 1 Requirements; Pb-Free Packages are Available", Manufacturer_Name=onsemi, Mouser Part Number=863-MBR120VLSFT1G, Datasheet Link=https://www.onsemi.com/pub/Collateral/MBR120VLSFT1-D.PDF, Geometry.Height=0.98mm, Manufacturer_Part_Number=MBR120VLSFT1G, Mouser Price/Stock=https://www.mouser.co.uk/ProductDetail/onsemi/MBR120VLSFT1G?qs=3JMERSakebpX%252BkItPpFCkg%3D%3D
D19 D20: "3.6V Data-Line Surge and 30kV ESD Protection Diode Array", Manufacturer_Name="Texas Instruments", Mouser Part Number=595-ESDS312DBVR, Datasheet Link=http://www.ti.com/lit/gpn/esds312, Geometry.Height=1.45mm, Manufacturer_Part_Number=ESDS312DBVR, Mouser Price/Stock=https://www.mouser.co.uk/ProductDetail/Texas-Instruments/ESDS312DBVR?qs=byeeYqUIh0PGNqB7QuJpTA%3D%3D
FB1 FB2 FB3 FB4 FB5 FB7: library part FB_0805, "Ferrite Bead SMD 0805"
FB6: library part CMP-08257-000202-1, "Power line Ferrite Bead 330Ω @ 100MHz 1.7A DCR 0.08Ω SMD 0603", Case Code (Imperial)=0603, Case Code (Metric)=1608, Current Rating=1.7A, DC Resistance (DCR)=80mR, Package Quantity=1, Tolerance=25%, Case/Package=0603, Core Material=Ferrite, Height=0.037inch, Impedance=330R, Lead Free="Lead Free", Length=0.063inch, Max DC Current=1.7A, Mount="Surface Mount", Packaging="Tape and Reel", REACH SVHC="No SVHC", RoHS Compliant=Yes, Width=0.031inch
J1 J4 J6: library part CMP-25680-000019-1, "CONN HEADER VERT 16POS 2.54MM", Current Rating=3A, Manufacturer=Sullins, Package=0, Temperature="-40°C to +105°C", Temperature Range High=+105°C, Temperature Range Low=-40°C, Automotive=No, Category=Conn, ComponentLink2Description=Datasheet, ComponentLink2URL=https://drawings-pdf.s3.amazonaws.com/11091.pdf, Conn Gender=Male, Conn Orientation=Straight, Contact Material=Gold,Nickel, Device Class L1=Connectors, Device Class L2="Headers and Wire Housings", Device Class L3=unset, Digikey Description="CONN HEADER VERT 16POS 2.54MM", Height=9.3mm, Lead Free=Yes, Manufacturer Part Number=SBH11-PBPC-D08-ST-BK, Number Of Contacts=16, Number Of Rows=2, Octopart=https://octopart.com/sbh11-pbpc-d08-st-bk-sullins-12270491, Pitch=2.54mm, RoHS=TRUE, Standoff Height=0.3mm
J2 J3: "BNC RF Interface, Jack, 50 ohm, Bayonet, 4 GHz Operating Frequency, Cable-to-Board, 1 Position, Printed Circuit Board, Board Mount / Panel Mount", Manufacturer_Name="TE Connectivity", Mouser Part Number=571-5413879-2, Datasheet Link=https://www.te.com/commerce/DocumentDelivery/DDEController?Action=srchrtrv&DocNm=5413879&DocType=Customer%20Drawing&DocLang=English&PartCntxt=5413879-2&DocFormat=pdf, Geometry.Height=12.95mm, Manufacturer_Part_Number=5413879-2, Mouser Price/Stock=https://www.mouser.co.uk/ProductDetail/TE-Connectivity/5413879-2?qs=dJbzCyn%252BCFbDLsMjA0NFtQ%3D%3D
J5: library part CMP-1023-00133-1, "Low Profile Socket Strips, Through-hole, Vertical, -55 to 125 degC, 2.54 mm Pitch, 4-Pin, Female, RoHS", Manufacturer=Samtec, PartNumber=SLW-104-01-L-S, Temperature Range="-55 to 125 degC", ComponentLink1Description="Manufacturer URL", ComponentLink1URL=http://www.samtec.com, ComponentLink2Description=Datasheet, ComponentLink2URL=http://www.samtec.com/documents/webfiles/pdf/SLW.PDF, ComponentLink3Description="Package Specification", ComponentLink3URL=http://www.samtec.com/documents/webfiles/cpdf/SLW-1XX-01-X-X-MKT.pdf, DatasheetVersion=F-214, Mounting Technology=Through-hole, Orientation=Vertical, PackageDescription="Low Profile Socket Strip", PackageReference=SLW-104-01-X-S, PackageVersion="X, 9/1987", Pitch="2.54 mm", RoHS=True
J7: library part CMP-245163-000001-1, "CONN RCPT USB2.0 TYPEC 5A", Current Rating=5/6.25/1.25/0.25A, Manufacturer=GCT, Package=0, Temperature="-40°C to +85°C", Temperature Range High=+85°C, Temperature Range Low=-40°C, Voltage Rating=20V, Automotive=No, Category=Conn, ComponentLink2Description=Datasheet, ComponentLink2URL=https://gct.co/files/drawings/usb4105.pdf, Conn Orientation="Right Angle", Contact Material=Gold,Nickel, Device Class L1=Connectors, Device Class L2="USB Connectors", Device Class L3=unset, Digikey Description="CONN RCPT USB2.0 TYPEC 5A", Height=3.46mm, Is Female=yes, Lead Free=Yes, Manufacturer Part Number=USB4105-GF-A, Number Of Contacts=16, Octopart=https://octopart.com/usb4105-gf-a-gct-106627878, RoHS=TRUE, Usb Standard="USB 2.0"
J8: library part CMP-1024-00100-1, "Modified .025\" SQ Post Header, Through-hole, Right Angle, -55 to 125 degC, 2.54 mm Pitch, 3-Pin, Male, RoHS", Manufacturer=Samtec, PartNumber=MTSW-103-08-G-S-229-RA, Temperature Range="-55 to 125 degC", ComponentLink1Description="Manufacturer URL", ComponentLink1URL=http://www.samtec.com, ComponentLink2Description=Datasheet, ComponentLink2URL=http://www.samtec.com/documents/webfiles/pdf/MTSW.PDF, ComponentLink3Description="Package Specification", ComponentLink3URL=http://www.samtec.com/documents/webfiles/cpdf/MTSW-XXX-XX-X-X-XXXX-XX-XXX-MKT1.pdf, DatasheetVersion=F-214, Mounting Technology=Through-hole, Orientation="Right Angle", PackageDescription="Assembly .025\" [.64] SQ Post Terminal Strip", PackageReference=MTSW-103-08-X-S-229-RA, PackageVersion="BI, 2/1987", Pitch="2.54 mm", RoHS=True
J9: library part CMP-02766-001396-1, "CONN RCPT 3POS 0.1 TIN PCB", Color=Black, Contact Resistance=10mR, Max Current Rating=7.6A, Max Operating Temperature=105°C, Max Voltage Rating (AC)=550V, Min Operating Temperature=-55°C, Connector Type=Receptacle, Contact Material=Bronze, Contact Plating=Tin, Contact Type="Female Socket", Gender=Female, Height=8.51mm, Housing Color=Black, Housing Material=Plastic, Lead Free="Lead Free", Length=8.13mm, Mount="Through Hole", Number Of Contacts=3, Number of Positions=3, Number Of Rows=1, Orientation=Straight, Packaging=Bulk, Pitch=2.54mm, Radiation Hardening=No, RoHS Compliant=Yes, Series=SSQ, Termination=Solder, Width=2.41mm
J10: "MagJack 10/100BASE-T", Manufacturer_Name=BelFuse, Mouser Part Number=530-SI-60118-F, Datasheet Link=https://componentsearchengine.com/Datasheets/1/SI-60118-F.pdf, Geometry.Height=15.21mm, Manufacturer_Part_Number=SI-60118-F, Mouser Price/Stock=https://www.mouser.com/Search/ProductDetail.aspx?qs=SRYZG9HaIQ1pVFtjOaj56g%3d%3d
JMP1: library part JMP2_TH, "Jumper 2 Pins Through-Hole DO NOT PLACE"
Q1 Q2: library part CMP-2000-05934-1, "NPN Small Signal Transistor, 45 V, 500 mA, -65 to 150 degC, 3-Pin SOT323, RoHS, Tape and Reel", Collector- Base Voltage VCBO=50V, Collector- Emitter Voltage VCEO Max=45V, Collector-Emitter Saturation Voltage=0.7V, Emitter- Base Voltage VEBO=5V, Manufacturer=DiodesIncorporated, Maximum DC Collector Current=1A, Maximum Operating Temperature=+150C, Minimum Operating Temperature=-65C, Package / Case=SOT-23, Package Description="3-Pin Small Outline Transistor, Body 2 x 1.25 mm, Pitch 0.65 mm", Package Reference=SOT323, Pd - Power Dissipation=200mW, Brand=DiodesIncorporated, Configuration=Single, Datasheet URL=http://www.diodes.com/_files/datasheets/ds30575.pdf, Datasheet Version="Rev. 5-2, 01/2014", DC Collector/Base Gain hfe Min=250, Factory Pack Quantity=3000, Gain Bandwidth Product fT=100MHz, Height=1mm, Length=2.2mm, Manufacturer URL=http://www.diodes.com/, Mounting Style=SMD/SMT, Mounting Technology=SurfaceMount, Packaging=Reel, Product Category=BipolarTransistors-BJT, RoHS=True, Series=BC817, Transistor Polarity=NPN, Unit Weight=0.000282oz, Width=1.35mm
R1 R2 R3 R4 R5 R6 R7 R8 R9 R10 R11 R12 R13 R14 R15 R16 R17 R18 R19 R20 R21 R22 R23 R24 R25 R26 R27 R28 R29 R30 R31 R32 R33 R34 R35 R36 R37 R38 R39 R40 R41 R42 R43 R44 R45 R46 R47 R48 R49 R50 R51 R52 R53 R54 R55 R56 R57 R58 R59 R60 R61 R62 R63 R64 R65 R66 R67 R68 R69 R70 R71 R72 R73 R74 R75 R76 R77 R78 R79 R80 R81 R82 R83 R84 R85 R86 R87 R88 R89 R90 R91 R92 R93 R94 R95 R96 R97 R98 R99 R100 R101 R102 R103 R104 R105 R106 R107 R108 R109 R110 R111 R112 R113 R114 R115 R116 R117 R118 R119 R120 R121 R122 R123 R124 R125 R126 R127 R128 R129 R130 R131 R132 R133 R134 R135 R136 R137 R138 R139 R140 R141 R142 R143 R144 R145 R146 R147 R148 R149 R150 R151 R152 R153 R154 R155 R156 R157 R158 R159 R160 R161 R162 R163 R164 R165 R166 R167 R168 R169 R170 R171 R172 R173 R174 R175 R176: library part RES_0805, "Resistor SMD 0805"
R177 R178: library part RES_0603, "Resistor SMD 0603"
RLY1 RLY2: library part CMP-0439-00001-1, "Low Power Consumption, High Dielectric, High Mechanical Shock Resistance, IM Relay", Ambient Temperature="-40 to 85 degC", Coil-contact Capacitance="2 pF", Contact Capacitance="1 pF", Limiting Continuous Current="2 A", Manufacturer="TE Connectivity", Power Consumption="140 mW", ComponentLink1Description="Manufacturer URL", ComponentLink1URL=http://www.te.com/, ComponentLink2Description=Datasheet, ComponentLink2URL=http://www.te.com/commerce/DocumentDelivery/DDEController?Action=showdoc&DocId=Specification+Or+Standard%7F108-98001%7FS%7Fpdf%7FEnglish%7FENG_SS_108-98001_S.pdf%7F1-1462037-4, Contact Material="PdRu +Au Covered", DatasheetVersion="Rev. 0411", Mounting Technology="Surface Mount", PackageDescription="8-Pin Relay, 10 x 6 mm Body, 0.95 mm Pitch", PackageReference=IM-8G-WING, PartNumber=IM03GR
SW1 SW2: library part CMP-03407-000026-1, "SWITCH TACTILE SPST-NO 0.05A 24V", RoHS Compliant=Yes
TP1 TP2 TP3 TP4 TP5 TP6 TP7 TP8 TP9 TP10 TP11 TP12 TP13 TP14 TP15 TP16 TP17 TP18 TP19 TP20 TP21 TP22 TP23 TP24 TP25 TP26 TP27 TP28 TP29 TP30 TP31 TP32 TP33 TP34 TP35 TP36 TP37 TP38 TP39 TP40 TP41 TP42 TP43 TP44 TP45 TP46 TP47 TP48 TP49 TP50 TP51 TP52 TP53 TP54 TP55 TP56 TP57 TP58 TP59 TP60 TP61 TP62 TP63 TP64 TP65 TP66 TP67 TP68 TP69 TP70 TP71 TP72 TP73 TP74 TP75 TP76 TP77 TP78 TP79 TP80 TP81 TP82 TP83 TP84 TP85: library part TEST_POINT_RND_1MM, "Test Point Round 1mm (NO BOM)"
U1 U2 U3 U4: library part CMP-0018-00513-2, "Single-High-Voltage, Low Distortion, Current-Feedback Operational Amplifier, 10 to 30 V, -40 to 85 degC, 8-pin SOP (DDA8), Green (RoHS & no Sb/Br)", Manufacturer="Texas Instruments", 2nd Harmonic(dBc)=66, 3rd Harmonic(dBc)=74, @ MHz=10, Acl, min stable gain(V/V)=1, BW @ Acl(MHz)=235, Code_JEDEC=MS-012, ComponentLink1Description="Manufacturer URL", ComponentLink1URL=http://www.ti.com/, ComponentLink2Description=Datasheet, ComponentLink2URL=http://www.ti.com/general/docs/lit/getliterature.tsp?genericPartNumber=THS3091&fileType=pdf, ComponentLink3Description="Package Specification", ComponentLink3URL=http://www.ti.com/litv/pdf/mpds092e, DatasheetVersion=SLOS423G, Diff Gain(%)=0.013, Diff Phase(deg)=0.02, Eco-Plan="Green (RoHS & no Sb/Br)", Iib(Max)(nA)=20000, Io(Typ)(mA)=250, Iq per channel(Max)(mA)=11, Mounting Technology="Surface Mount", Number of Channels=1, PackageDescription="8-Pin PowerPAD(TM) Plastic Small Outline, Body 4.9 x 3.9 mm, Pitch 1.27 mm", PackageReference=DDA8-1775X1775TP, PackageVersion="4202561/F, 12/2011", PartNumber=THS3091DDARG3, Settling Time (0.1%)(Typ)(ns)=42, Slew Rate(Typ)(V/us)=7300, Sub Family="High Output Current Amplifier (>=50mA), High Speed Amplifier (>=50MHz), High Supply Voltage Amplifier (>=30V)", THD (Fc is 1 MHz)(Typ)(dB)=-75, Vio(Max)(mV)=4, Vn at Flatband(Typ)(nV/rtHz)=2, Vs(Max)(V)=30, Vs(Min)(V)=10
U5 U6: library part CMP-0188-00759-2, "12-Bit Digital-to-Analog Converter with EEPROM Memory in SOT-23-6, 6-Pin SOT-23, Extended Temperature, Tape and Reel", Code_IPC=SOT26A-6, ComponentLink1Description="Manufacturer URL", ComponentLink1URL=http://www.microchip.com/, ComponentLink2Description=Datasheet, ComponentLink2URL=http://ww1.microchip.com/downloads/en/DeviceDoc/22039d.pdf, ComponentLink3Description="Package Specification", ComponentLink3URL=http://www.microchip.com/stellent/groups/techpub_sg/documents/packagingspec/en012702.pdf, DatasheetVersion="revD, Jun-2009", PackageDescription="6-Lead Plastic Small Outline Transistor (CH) [SOT-23]", PackageReference=SOT-23-CH6, PackageVersion="revBB, Aug-2009", RevisionNote="URLs added."
U7: library part CMP-1679-00010-1, "Low-Dropout Positive Fixed Voltage Regulator, 1 A, 3.3 V Output Voltage, 0 to 125 degC, 4-Pin SOT-223 (318H-01), Pb-Free, Tape and Reel", Case Code (Imperial)=0603, Case Code (Metric)=1608, Max Operating Temperature="155 degC", Min Operating Temperature="-55 degC", Package Quantity=5000, Power Rating="100 mW", Resistance="220 kohm", Tolerance=1%, Type (Resistor)="Thick Film", Voltage Rating="75 V", Case\Package=0603, ComponentLink1Description="Manufacturer URL", ComponentLink1URL=http://www.onsemi.com/, ComponentLink2Description=Datasheet, ComponentLink2URL=http://www.onsemi.com/pub_link/Collateral/NCP1117-D.PDF, DatasheetVersion="Rev. 27, 09/2014", Height="0.45 mm", Length="1.55 mm", Mount="Surface Mount", PackageDescription="4-Pin Small Outline Transistor, Body 6.5 x 3.5 mm, Pitch 2.3 mm", PackageReference=SOT-223-4-318H-01_A, Packaging="Tape and Reel", Radiation Hardening=No, REACH SVHC=Unknown, RoHSCompliant=true, Weight="7.1E-05 oz", Width="0.85 mm"
U8: library part CMP-78876-000011-1, "IC FLASH 16MBIT SPI/QUAD 8USON", RoHS Compliant=Yes
U9: "32-Bit Dual-Core ARM Cortex-M0+ Microcontroller", Manufacturer="Raspberry Pi", Manufacturer Part Number=RP2040